# Altium PCB PCB_layout.PcbDoc
Units mil, origin at the board's own origin, x right, y up, seen from the top; angles counter-clockwise.
Board outline 2585 x 2510 mil, 2 copper layers (Top Layer, Bottom Layer); 30 components, 25 nets, 99 pads, 4 vias.
Unrouted connection lines stored in the file: 2.
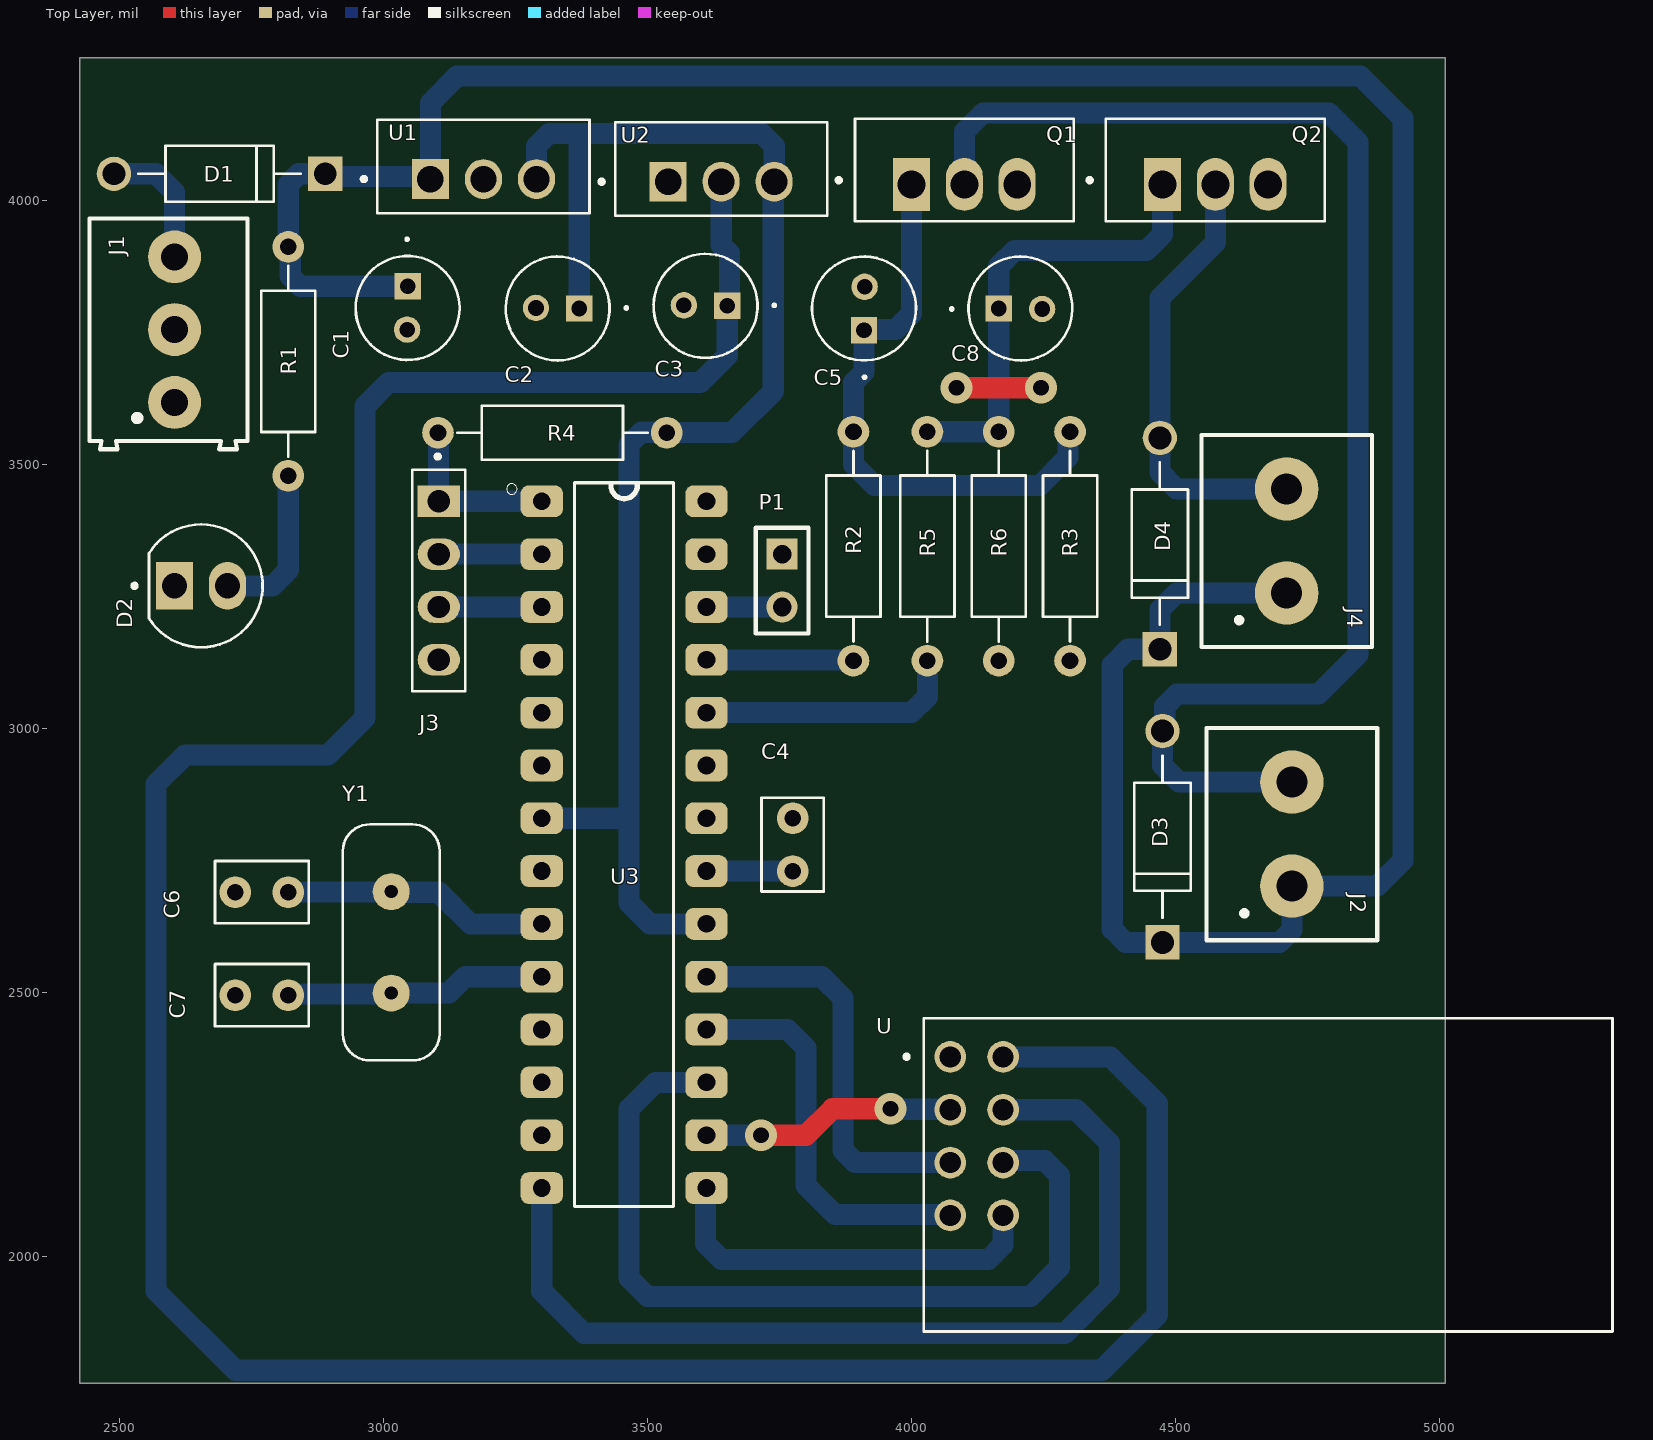
[diagram p0: Top Layer view]
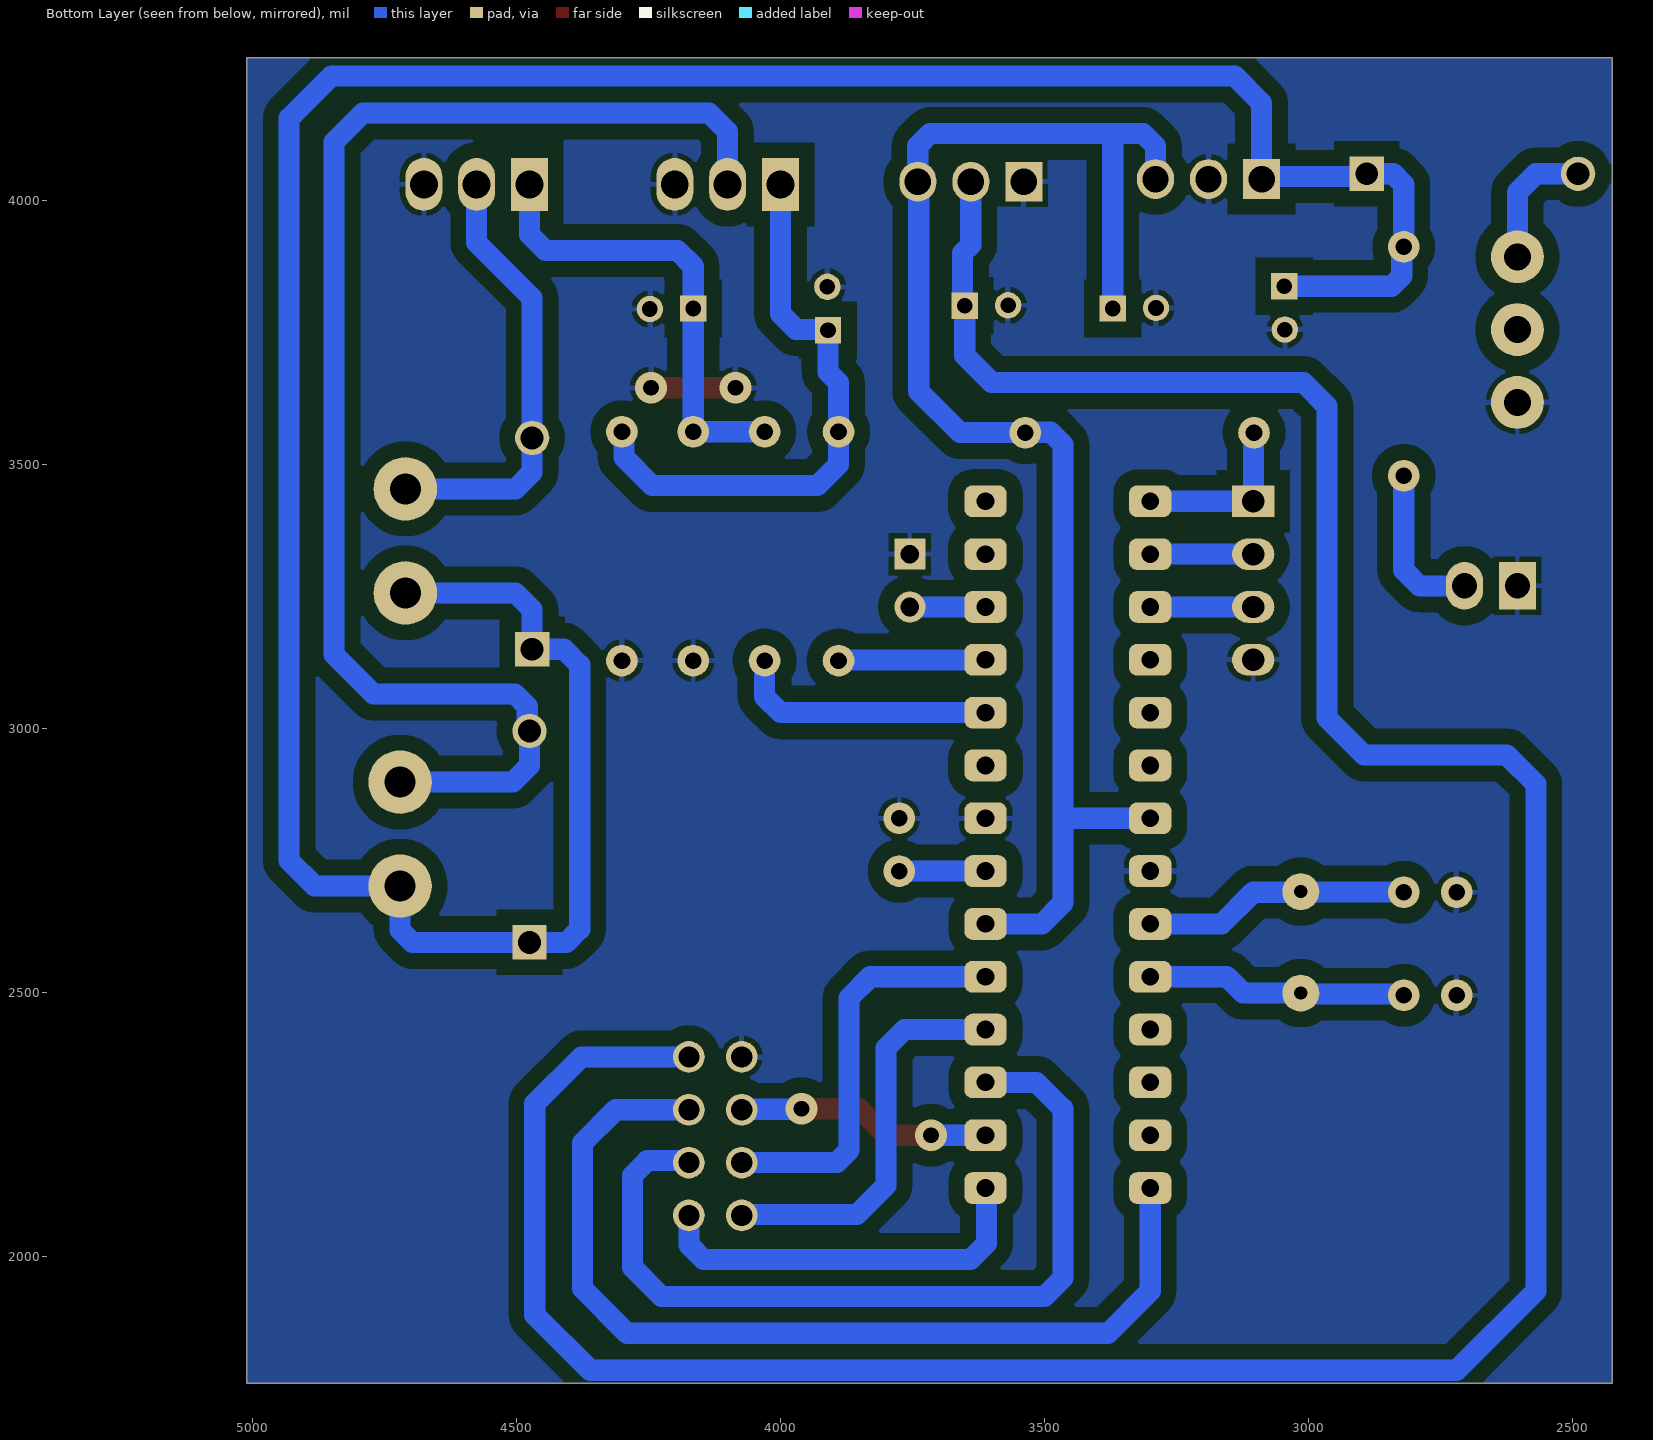
[diagram p1: Bottom Layer view, seen from below]
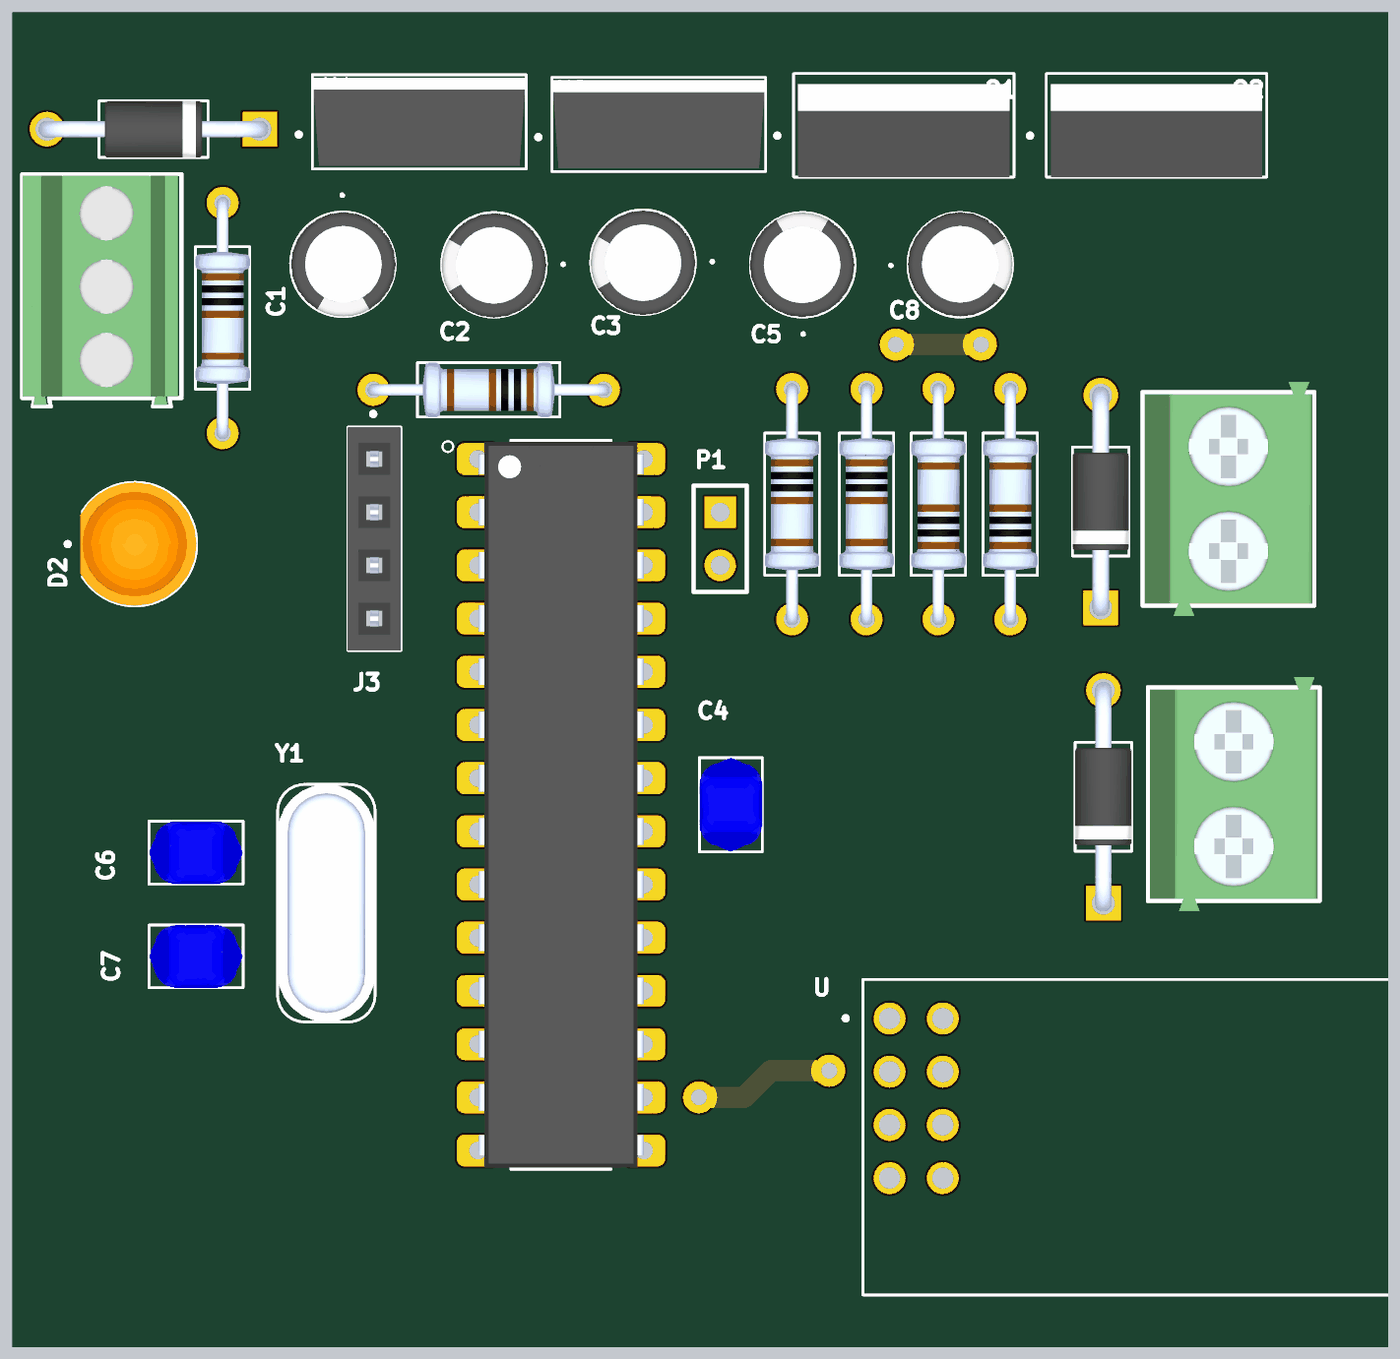
[diagram p2: 3D render of the assembled board from above, using the file's embedded part models]

## Layer stack, top to bottom
Top Solder: solder mask 0.4, Solder Resist, Dk 3.5
Top Layer: signal copper 1.4
Dielectric 1: dielectric 12.6, FR-4, Dk 4.8
Bottom Layer: signal copper 1.4
Bottom Solder: solder mask 0.4, Solder Resist, Dk 3.5

## Board outline
2425,1760 5010,1760 5010,4270 2425,4270

## Design rules (kind name [scope] priority, off if disabled: settings)
Clearance [All] p1: gap=30 ignorepadtopadclearanceinfootprint=FALSE
PolygonConnect [All] p1: connectstyle=Relief reliefconductorwidth=10 reliefentries=4 polygonreliefangle="90 Angle" airgapwidth=10
RoutingVias [All] p1: holewidth=30 width=60 viastyle="Through Hole" minholewidth=30 minwidth=60 maxholewidth=30 maxwidth=60
SolderMaskExpansion [All] p1: expansion=4 istentingtop=FALSE
Width [All] p1: maxlimit=50 minlimit=30 preferedwidth=40
30 further rules are at their usual default settings.

## Components (designator, comment, footprint, x,y, rotation, side; value= is the part's Value field where it differs from the comment)
C1 "100uF" CAPPRD500W50D500H1100 3046,3796 r270 top
C2 "10uF" CAPPRD500W50D500H1100 3330,3795 r180 top
C3 "10uF" CAPPRD500W50D500H1100 3610,3800 r180 top
C4 "22pF" CAPRB500W50L450T300H550 3775,2830 r270 top
C5 "100uF" CAPPRD500W50D500H1100 3910,3795 r90 top
C6 "22pF" CAPRB500W50L450T300H550 2720,2690 r0 top
C7 "22pF" CAPRB500W50L450T300H550 2720,2495 r0 top
C8 "100uF" CAPPRD500W50D500H1100 4206,3795 r0 top
D1 "1N4007" DIOAD1060W80L520D270 2690,4050 r180 top
D2 "L08R5000Q1" LEDRD254W57D500H1070 2655,3270 r0 top
D3 "1N4007" DIOAD1060W80L520D270 4475,2795 r90 top
D4 "1N4007" DIOAD1060W80L520D270 4470,3350 r90 top
J1 "TBlock 3" 691214110003 2605,3755 r90 top
J2 "TBlock 2" 691111710002 4720,2800 r90 top
J3 "Header 4" SULLINS_PPTC041LFBN-RC 3105,3280 r270 top
J4 "TBlock" 691111710002 4710,3355 r90 top
P1 "Header 2" HDR1X2 3755,3330 r270 top
Q1 "N-Channel mosfet" TO254P1052X465X1989-3 4000,4030 r0 top
Q2 "N-Channel mosfet" TO254P1052X465X1989-3 4475,4030 r0 top
R1 "1k" RESAD1100W55L680D260 2820,3695 r90 top
R2 "1k" RESAD1100W55L680D260 3890,3345 r90 top
R3 "1k" RESAD1100W55L680D260 4300,3345 r270 top
R4 "1k" RESAD1100W55L680D260 3320,3560 r0 top
R5 "1k" RESAD1100W55L680D260 4030,3345 r90 top
R6 "1k" RESAD1100W55L680D260 4165,3345 r270 top
U "NRF24L01P-MODULE-PCB" XCVR_NRF24L01P-MODULE-PCB 4675,2155 r0 top
U1 "LM7805" TO255P1020X450X1968-3 3189.61,4063.82 r0 top
U2 "LD1117V33" TO255P1020X450X1968-3 3639.61,4058.82 r0 top
U3 "ATMEGA328P-PU" DIP794W46P254L2967H457Q28B 3455.91,2780 r0 top
Y1 "16MHz" XTAL_ECS-160-20-4X 3015,2595 r270 top

## Footprints (in the part's own frame and the unit in brackets; to place one, negate y for a bottom-side part, rotate by r counter-clockwise, add the part's x,y. Pads: shape width x height; smd on the part's side, far side on the other; paste and mask are expansions set on the pad)
691111710002 [mil]
  round 120 hole 59.06: 1(-98.43,0) 2(98.43,0)
  silkscreen extent -201,-161 201,161, body extent -220,-157 220,157, height 434
691214110003 [mm]
  round 2.54 hole 1.3: 1(-3.5,0) 2(0,0) 3(3.5,0)
  silkscreen extent -5.75,-3.5 5.35,4.1, body extent -5.68,-3.32 5.28,4.08, height 8.51
CAPPRD500W50D500H1100 [mil]
  round 50 hole 29.53: N(41,-1)
  rect 50x50 hole 29.53: P(-41,0)
  silkscreen extent -131,-98 98,98, body extent -108,-97 108,99, height 434
CAPRB500W50L450T300H550 [mil]
  round 60 hole 31.5: 1(0,0) 2(100,0)
  silkscreen extent -39,-59 139,59, body extent -38,-59 138,59, height 210
DIOAD1060W80L520D270 [mm]
  round 1.65 hole 1.1: A(5.08,0)
  rect 1.65x1.65 hole 1.1: C(-5.08,0)
  silkscreen extent -3.9,-1.35 3.9,1.35, body extent -5.47,-1.35 5.47,1.35, height 2.52
DIP794W46P254L2967H457Q28B [mil]
  rrect50% 80x60 hole 33.46: 1(-155.91,650) 2(-155.91,550) 3(-155.91,450) 4(-155.91,350) 5(-155.91,250) 6(-155.91,150) 7(-155.91,50) 8(-155.91,-50) 9(-155.91,-150) 10(-155.91,-250) 11(-155.91,-350) 12(-155.91,-450) 13(-155.91,-550) 14(-155.91,-650) 15(155.91,-650) 16(155.91,-550) 17(155.91,-450) 18(155.91,-350) 19(155.91,-250) 20(155.91,-150) 21(155.91,-50) 22(155.91,50) 23(155.91,150) 24(155.91,250) 25(155.91,350) 26(155.91,450) 27(155.91,550) 28(155.91,650)
  silkscreen extent -223,-685 94,685, body extent -156,-682 156,683, height 180
HDR1X2 [mm] "Connector; Header; 2 Position"
  rect 1.5x1.5 hole 0.9: 1(0,0)
  round 1.5 hole 0.9: 2(2.54,0)
  silkscreen extent -1.27,-1.27 3.81,1.27
LEDRD254W57D500H1070 [mil]
  oval 70x90 hole 47.64: A(50,0)
  rect 70x90 hole 47.64: C(-50,0)
  silkscreen extent -130,-116 116,116, body extent -102,-116 116,116, height 358
RESAD1100W55L680D260 [mil]
  round 60 hole 31.5: 1(-216.54,0) 2(216.54,0)
  silkscreen extent -180,-51 180,51, body extent -227,-51 227,51, height 101
SULLINS_PPTC041LFBN-RC [mil]
  rect 60x80 hole 42.13: 1(-150,0)
  oval 60x80 hole 42.13: 2(-50,0) 3(50,0) 4(150,0)
  silkscreen extent -239,-50 210,50, body extent -210,-50 210,50, height 335
TO254P1052X465X1989-3 [mil]
  rect 70x100 hole 52.76: 1(0,0)
  oval 70x100 hole 52.76: 2(100,0) 3(200,0)
  silkscreen extent -142,-70 307,124, body extent -99,-70 299,105, height 781
TO255P1020X450X1968-3 [mm]
  rect 1.778x1.91 hole 1.27: 1(-2.55,-0.605)
  oval 1.778x1.91 hole 1.27: 2(0,-0.605) 3(2.55,-0.605)
  silkscreen extent -5.85,-2.25 5.1,2.25, body extent -5.08,-2.09 5.08,2.11, height 22.87
XCVR_NRF24L01P-MODULE-PCB [mil]
  round 60 hole 40: 1(-601.75,223.18) 2(-501.75,223.18) 3(-601.75,123.18) 4(-501.75,123.18) 5(-601.75,23.18) 6(-501.75,23.18) 7(-601.75,-76.82) 8(-501.75,-76.82)
  silkscreen extent -688,-296 652,296
XTAL_ECS-160-20-4X [mil]
  round 70 hole 24.8: 1(-96.06,0) 2(96.06,0)
  silkscreen extent -223,-92 223,92, body extent -223,-92 223,92, height 138

## Part data
C1 C2 C3 C5 C8: library part "Electrolytic capacitor", "FS-A", Package=None, Availability=Unavailable, MF="{'manufacturer': u'Panasonic'}", MP=EEUFS0J221B, Price=None
C4 C6 C7: library part "Ceramic capacitor", "2200 pF Â±10% 250V Ceramic Capacitor X7R Radial", Package="Radial TDK", Check_prices=https://www.snapeda.com/parts/FG24X7R2E222KNT06/TDK/view-part/?ref=eda, Digi-Key_Part_Number=445-173386-1-ND, MF=TDK, MP=FG24X7R2E222KNT06, Purchase-URL=https://pricing.snapeda.com/search/part/FG24X7R2E222KNT06/?ref=eda, SnapEDA_Link=https://www.snapeda.com/parts/FG24X7R2E222KNT06/TDK/view-part/?ref=snap
D1 D3 D4: "Diode Switching 1KV 1A 2-Pin DO-41", Package=None, Availability=Unavailable, MP=1N4007, Price=None
D2: library part LED, "LED, Orange, Through Hole, T-1 3/4 (5mm), 30 mA, 2.1 V, 635 nm", Package=None, Availability=Unavailable, MF="{'manufacturer': u'LED Technology'}", MP=L08R5000Q1, Price=None
J1: library part "Terminal blocks - 3Pins (Small)", "3 Position Wire to Board Terminal Block Horizontal with Board 0.138 (3.50mm) Through Hole", Package=None, Availability="In Stock", Check_prices=https://www.snapeda.com/parts/691214110003/Wurth+Elektronik/view-part/?ref=eda, MF="Wurth Elektronik", MP=691214110003, Price=None, Purchase-URL=https://pricing.snapeda.com/search/part/691214110003/?ref=eda, SnapEDA_Link=https://www.snapeda.com/parts/691214110003/Wurth+Elektronik/view-part/?ref=snap
J2 J4: library part "Terminal Block - 2Pins", "2 Position Wire to Board Terminal Block Horizontal with Board 0.197 _5.00mm_ Through Hole", Package=None, Availability=Unavailable, MF="Wurth Electronics", MP=691111710002, Price=None, SnapEDA_Link=https://www.snapeda.com/parts/691111710002/Wurth%20Electronics%20Inc./view-part/1195092/?ref=snap
J3: library part "Female header - 4Pins", "4 Position Header Connector Through Hole", Package=None, Availability=Warning, Check_prices=https://www.snapeda.com/parts/PPTC041LFBN-RC/Sullins%20Connector%20Solutions/view-part/285917/?ref=eda, MF="Sullins Connector", MP=PPTC041LFBN-RC, Price=None, Purchase-URL=https://pricing.snapeda.com/search/part/PPTC041LFBN-RC/?ref=eda, SnapEDA_Link=https://www.snapeda.com/parts/PPTC041LFBN-RC/Sullins%20Connector%20Solutions/view-part/285917/?ref=snap
P1: "Header, 2-Pin", LatestRevisionDate=17-Jul-2002, LatestRevisionNote="Re-released for DXP Platform.", Publisher="Altium Limited"
Q1 Q2: library part IRF540, "N-Channel 100V 22A (Tc) 85W (Tc) Through Hole TO-220AB", Package=None, Availability=Unavailable, MP=IRF540, Price=None
R1 R2 R3 R4 R5 R6: library part "Resistor (0.25W)", "(MFR-25FBF52-10K) 10,2 kOhm bei 1% 0,25W, 1/4W Durchbohrlochwiderstand Axial Metal Film", Package="Axial Yageo", Digi-Key_Part_Number=10.2KXBK-ND, MF=Yageo, MP=MFR-25FBF52-10K, Purchase-URL=https://pricing.snapeda.com/search/part/MFR-25FBF52-10K/?ref=eda, SnapEDA_Link=https://www.snapeda.com/parts/MFR-25FBF52-10K/Yageo/view-part/424333/?ref=snap
U: "- Transceiver For Use With nRF24L01+", Package=None, Availability=Bad, MF="Nordic Semiconductor", Mouser-Purchase-URL=https://snapeda.com/shop?store=Mouser&id=230534, MP=NRF24L01P-MODULE-PCB, Price=None, SnapEDA_Link=https://www.snapeda.com/parts/NRF24L01P-MODULE-PCB/Nordic%20Semiconductor%20ASA/view-part/230534/?ref=snap
U1: library part LM78__, Package=None, Availability=Unavailable, MP=LM7805CT/NOPB, Price=None
U2: Package=None, Availability=Unavailable, MP=LD1117V33, Price=None
U3: "ATmega Series 20 MHz 32 KB Flash 2 KB SRAM 8-Bit Microcontroller - DIP-28", Package=None, Availability=Unavailable, MP=ATMEGA328P-PU, Price=None
Y1: library part "Crystal oscilator", "CRYSTAL T/H", Package=None, Availability=Unavailable, MF="{'manufacturer': u'ECS Inc.'}", MP=ECS-160-S-4, Price=None

## Via types
v1: diameter 60, hole 30, Top Layer to Bottom Layer, 4 vias

## Nets (pads, with @x,y where several pads share a name; then routed paths per layer and width w, separated by ;. In a path a pad name is that pad's centre, name@x,y a point inside that pad or via, vN(x,y) a via of type N, cw(c..) or ccw(c..) an arc to the next point about the centre after c; other vN are vias at no path point)
+3V3: C3.P U2.2 U.2 | length 5788.5
  Bottom Layer w40: U2.2 3639.61,3915.39 3655,3900 3655,3804 C3.P 3651,3706 3600,3655 3010,3655 2965,3610 2965,3020 2895,2950 2625,2950 2570,2895 2570,1935 2720,1785 4360,1785 4465,1890 4465,2290 4376.81,2378.18 U.2
+5: C2.P R4.2 U1.3 U2.3 U3.7 U3.20 | length 2825.5
  Bottom Layer w40: U1.3 3290,4102.57 3313.43,4126 3716.57,4126 3740,4102.57 U2.3 3738.27,4033.27 3738.27,3638.27 3660,3560 R4.2 3535.71,3560.82 3488.43,3560.82 3465,3537.39 3465,2830 ; U3.7 3465,2830 ; C2.P 3371,4112 ; U3.20 3505,2630 3465,2670 3465,2830
+12: C1.P D1.C D3.C D4.C J2.1 J4.1 R1.2 U1.1 | length 5734.9
  Bottom Layer w40: C1.P 2843.43,3837 2823.83,3856.6 2823.83,3907.71 R1.2 2820,4030 2840,4050 D1.C 2895,4045 3084.21,4045 U1.1 3089.21,4184.21 3140,4235 4850,4235 4930,4155 4930,2750 4881.57,2701.57 J2.1 4720,2618.43 4696.57,2595 D3.C 4405,2595 4380,2620 4380,3120 4410,3150 D4.C 4470,3225 4501.57,3256.57 J4.1
CE: U3.16 U.3 | length 480.2
  Top Layer w40: v1(3715,2230) 3800,2230 3850,2280 v1@3957.29,2280
  Bottom Layer w40: U3.16 v1(3715,2230) ; v1(3960,2280) 3960.91,2279.09 4072.34,2279.09 U.3
CSN: U3.14 U.4 | length 1841.3
  Bottom Layer w40: U3.14 3300,1935 3380,1855 4290,1855 4375,1940 4375,2215 4311.81,2278.18 U.4
GND: C1.N C2.N C3.N C4.1 C5.N C6.1 C7.1 C8.N D2.C J1.1 J3.4 P1.1 Q1.3 Q2.3 R3.2 R6.2 U1.2 U2.1 U3.8 U3.22 U.1 | length 160
  Top Layer w40: v1(4085,3645) v1(4245,3645)
IRQ: U3.15 U.8 | length 748.4
  Bottom Layer w40: U3.15 3611.81,2121.81 3610,2120 3610,2025 3640,1995 4145.61,1995 4173.25,2022.64 U.8
MISO: U3.18 U.7 | length 759.5
  Bottom Layer w40: U3.18 3765,2430 3800,2395 3800,2135 3855,2080 4071.44,2080 U.7
MOSI: U3.17 U.6 | length 1633.8
  Bottom Layer w40: U3.17 3515,2330 3465,2280 3465,1960 3500,1925 4225,1925 4280,1980 4280,2154.02 4252.01,2182.01 4177.07,2182.01 U.6
NetC4_2: C4.2 U3.21 | length 163.2
  Bottom Layer w40: U3.21 C4.2
NetC5_P: C5.P Q1.1 R2.2 R3.1 | length 1104.7
  Bottom Layer w40: Q1.1 4000,3785 3970,3755 3911,3755 C5.P 3910,3675 3890,3655 3890,3500 3930,3460 4242.74,3460 4296.17,3513.43 4296.17,3557.71 R3.1
NetC8_P: C8.P Q2.1 R5.2 R6.1 | length 878.3
  Bottom Layer w40: R5.2 R6.1 C8.P 4165,3875 4195,3905 4445,3905 4475,3935 Q2.1
NetD1_A: D1.A J1.3 | length 251.7
  Bottom Layer w40: D1.A 2570,4050 2605,4015 J1.3
NetD2_A: D2.A R1.1 | length 305.9
  Bottom Layer w40: D2.A 2790,3270 2820,3300 R1.1
NetD3_A: D3.A J2.2 Q1.2 | length 2630.2
  Bottom Layer w40: Q1.2 4100,4130 4135,4165 4790,4165 4845,4110 4845,3140 4770,3065 4502.65,3065 4479.22,3041.57 4479.22,2999.22 D3.A 4475,2930 4506.57,2898.43 J2.2
NetD4_A: D4.A J4.2 Q2.2 | length 841.6
  Bottom Layer w40: Q2.2 4575,3920 4470,3815 D4.A 4470,3485 4501.57,3453.43 J4.2
pump1: R5.1 U3.24 | length 499.1
  Bottom Layer w40: U3.24 4000,3030 4030,3060 R5.1
pump2: R2.1 U3.25 | length 278.8
  Bottom Layer w40: U3.25 3612.58,3129.23 3889.23,3129.23 R2.1
reset: J3.1 R4.1 U3.1 | length 328.1
  Bottom Layer w40: R4.1 3104.23,3559.23 3104.23,3430.77 J3.1 U3.1 U3.1@3301.73,3431.73
rx: J3.3 U3.3 | length 195
  Bottom Layer w40: J3.3 U3.3
SCK: U3.19 U.5 | length 776.1
  Bottom Layer w40: U3.19 3830,2530 3870,2490 3870,2201.62 3893.43,2178.18 U.5
sensor: P1.2 U3.26 | length 143.2
  Bottom Layer w40: U3.26 P1.2
tx: J3.2 U3.2 | length 195
  Bottom Layer w40: J3.2 U3.2
Xtal1: C6.2 U3.9 Y1.1 | length 505.7
  Bottom Layer w40: C6.2 2820.53,2690.53 3014.47,2690.53 Y1.1 3016.06,2690 3105,2690 3165,2630 U3.9
Xtal2: C7.2 U3.10 Y1.2 | length 494.5
  Bottom Layer w40: C7.2 2821.97,2496.97 3013.03,2496.97 Y1.2 3123.94,2498.94 3155,2530 U3.10
pads on no net: J1.2 U3.4 U3.5 U3.6 U3.11 U3.12 U3.13 U3.23 U3.27 U3.28

## Polygon pours and split planes (outlines as drawn)
GND on Bottom Layer "GND_L02_P000" (solid, pour order 0): 2425,4270 2425,1760 5009.97,1760 5010.15,1760.18 5010,1760.33 5010,4270